# EAGLE board ambilight (EAGLE 6.4)
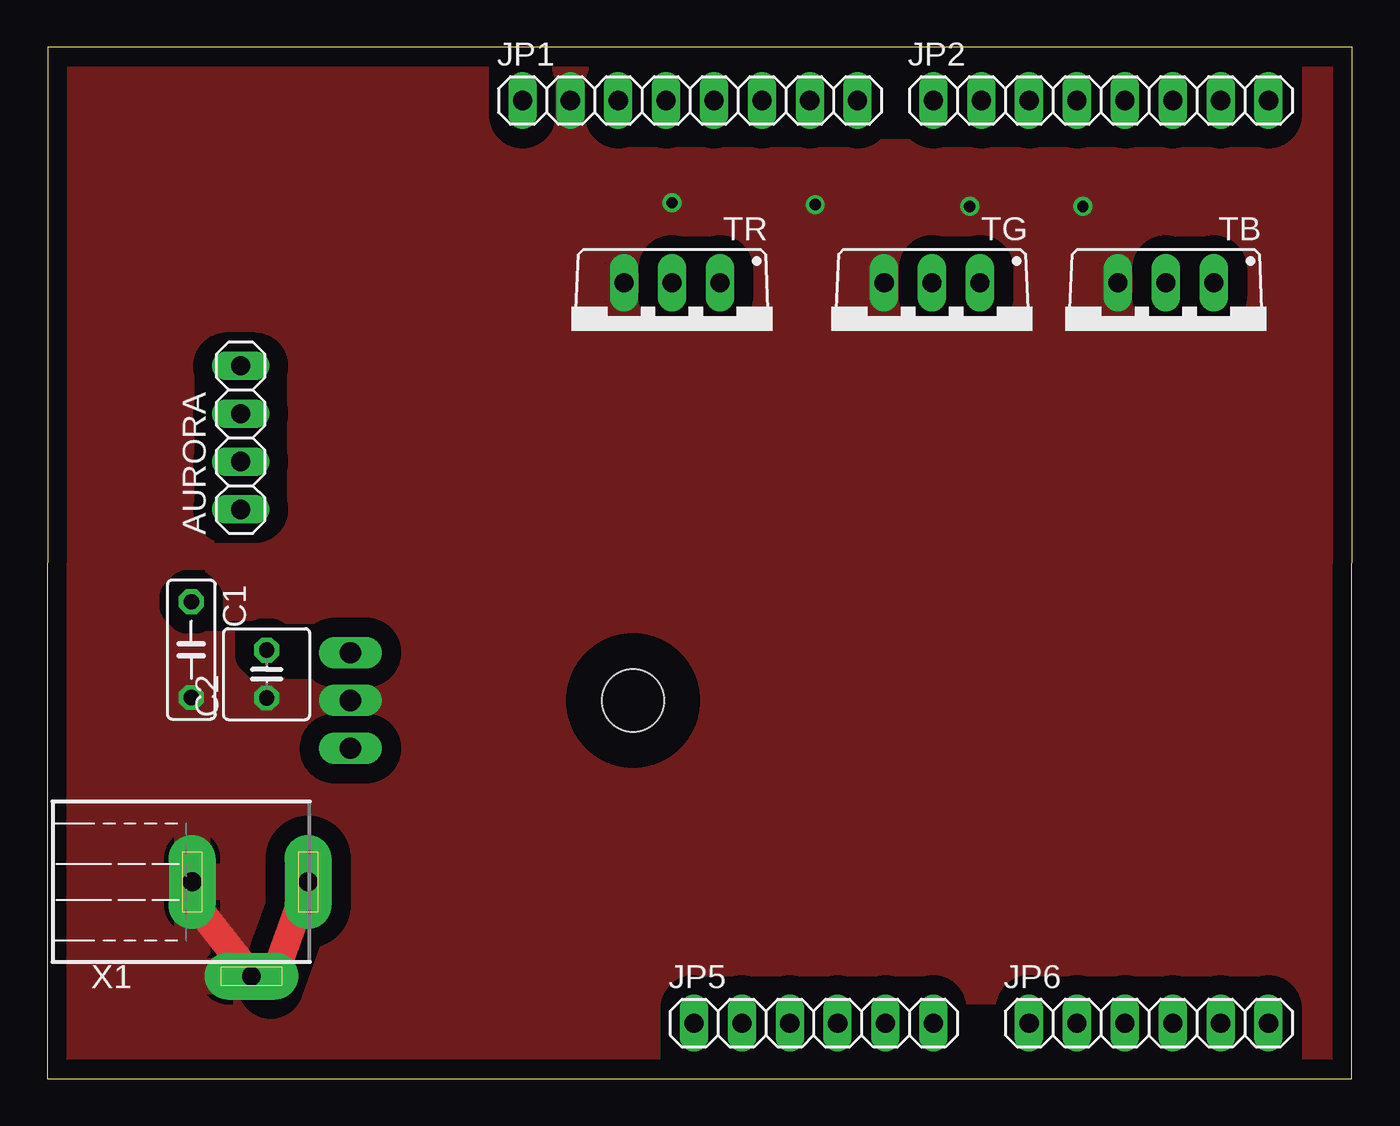
[diagram p0: board, top side]
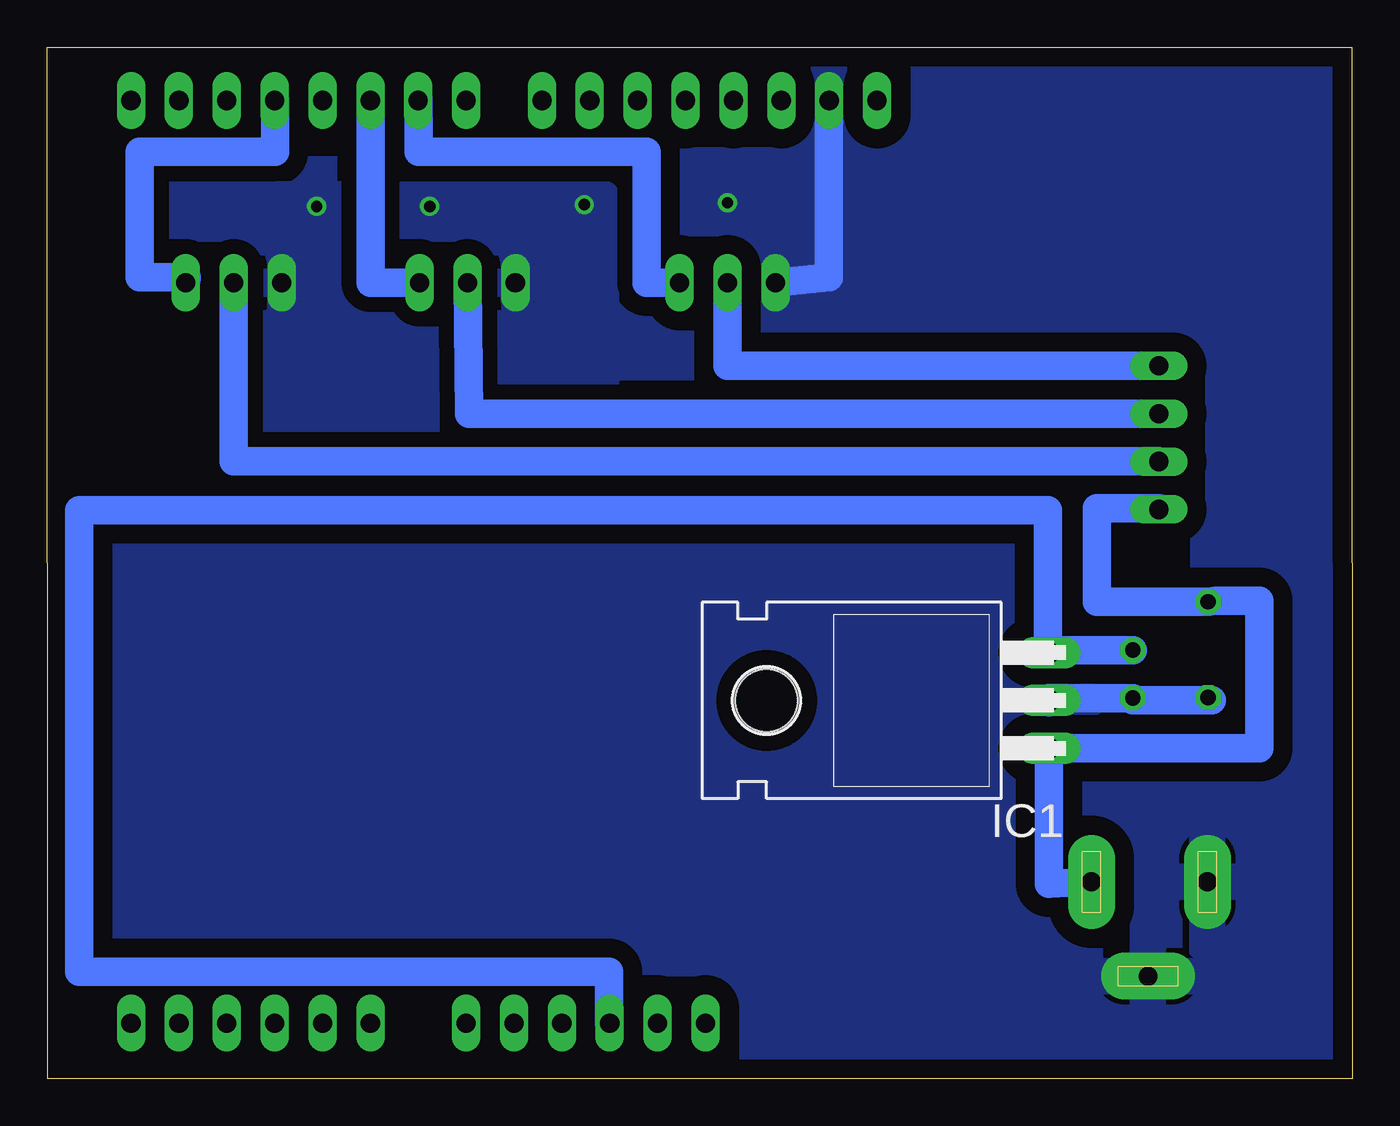
[diagram p1: board, bottom side, seen from below]

Size 69.25 x 54.7 mm. Coordinates in mm from the lower left corner, seen from the top.
Outline: 0,0 69.22,0 69.25,54.7 0.03,54.7 0,0
Copper layers (1*16): Top 0.035mm / dielectric 1.5mm / Bottom 0.035mm
Design rules "default": minimum track width 10mil, minimum drill 24mil, track to track 8mil, track to pad 8mil, pad to pad 8mil, via to via 8mil, smd to smd 8mil, copper to edge 40mil, drill to drill 8mil, minimum pad ring 10mil, minimum via ring 8mil, stop-mask expansion 4mil, vias tented up to drill 0mil, thermal gap 10mil

## Footprints (pad centres in the part's own frame; a part is rotated, then mirrored left to right if it is on the bottom)
1X04 = drill 1.016 long: 1 -3.81,0; 2 -1.27,0; 3 1.27,0; 4 3.81,0
C050-025X075 = drill 0.813 octagon: 1 -2.54,0; 2 2.54,0
C025-050X050 = drill 0.813 octagon: 1 -1.27,0; 2 1.27,0
TO220H = drill 1.118 long: 1 -2.54,-10.16; 2 0,-10.16; 3 2.54,-10.16 | hole 3.302: 0,4.826
1X08 = drill 1.016 long: 1 -8.89,0; 2 -6.35,0; 3 -3.81,0; 4 -1.27,0; 5 1.27,0; 6 3.81,0; 7 6.35,0; 8 8.89,0
1X06 = drill 1.016 long: 1 -6.35,0; 2 -3.81,0; 3 -1.27,0; 4 1.27,0; 5 3.81,0; 6 6.35,0
TO220BV = drill 1.016 long: D 0,-2.54; G -2.54,-2.54; S 2.54,-2.54
733980-62 = drill 1 pad 2.5 long: 1 0,8.57; 2 0,2.42; 3 5,5.57

## Placement (x,y rotation side)
AURORA  [1X04]  10.27,33.99 90 top
C1  330n  [C050-025X075]  7.65,22.75 270 top
C2  100n  [C025-050X050]  11.65,21.45 90 top
IC1  7805T  [TO220H]  26.25,20.05 90 bottom
JP1  [1X08]  34.11,51.87 0 top
JP2  [1X08]  55.91,51.87 0 top
JP5  [1X06]  40.67,2.94 0 top
JP6  [1X06]  58.45,2.94 0 top
TB  foo  [TO220BV]  59.35,39.66 180 top
TG  foo  [TO220BV]  46.95,39.66 180 top
TR  foo  [TO220BV]  33.15,39.66 180 top
X1  [733980-62]  5.27,10.43 270 top

## Library data of the parts
AURORA JP1 JP2 JP5 JP6 = pinhead
C1 = resistor
C2 = rcl
IC1 = linear
TB TG TR = transistor-power
X1 = con-conrad

## Nets
GND: C1.2 C2.1 IC1.2 JP1.2 TB.S TG.S TR.S X1.2 X1.3
N$4: C2.2 IC1.3 JP5.3
N$6: AURORA.1 C1.1 IC1.1 X1.1
N$7: JP2.5 TB.G
N$9: JP2.3 TG.G
N$10: JP2.2 TR.G
N$11: AURORA.4 TR.D
N$12: AURORA.3 TG.D
N$13: AURORA.2 TB.D

## Tracks (layer width: path | path; a pad name or v marks a point on that pad's centre or on a via)
GND  (via drill 0.6)
  Top 1.5: X1.3 7.33,9.93
  Bottom 1.5: 16.09,19.95 IC1.2 16.09,20.18 C2.1 | TR.S 27.76,42.5 JP1.2
  other vias: 33.15,46.45 40.75,46.35 48.95,46.25 54.95,46.25
  pour Bottom (isolate 1.016): 0.15,54.75 69.15,54.75 69.15,-0.15 0.15,-0.15
  pour Top (isolate 1.016): 69.15,54.85 69.15,0.05 0.15,0.05 0.15,23.45 0.65,39.05 0.65,39.25 0.05,39.25 0.05,55.55
  pour Bottom (isolate 0.8): 39.65,46.85 67.15,46.85 67.15,31.35 39.65,31.35
N$4
  Bottom 1.5: C2.2 16.09,22.72 IC1.3 | IC1.3 15.95,22.59 | IC1.3 16.15,22.59 16.15,30.15 67.55,30.15 67.55,21.35 67.55,21.05 67.55,5.65 39.45,5.65 39.45,2.94 JP5.3
N$6
  Top 1.5: X1.1 11.85,4.93
  Bottom 1.5: X1.1 16.09,10.33 IC1.1 4.95,17.51 4.95,25.35 7.25,25.35 C1.1 13.55,25.29 13.55,30.25 10.27,30.25 AURORA.1
N$7
  Bottom 1.5: JP2.5 57.15,51.87 57.15,49.15 64.35,49.15 64.35,42.5 61.85,42.5 TB.G
N$9
  Bottom 1.5: TG.G 52.1,42.2 JP2.3
N$10
  Bottom 1.5: JP2.2 49.55,49.15 37.45,49.15 37.45,42.2 TR.G
N$11
  Bottom 1.5: AURORA.4 33.15,37.8 TR.D
N$12
  Bottom 1.5: AURORA.3 46.85,35.26 TG.D
N$13
  Bottom 1.5: AURORA.2 10.27,32.75 59.35,32.75 TB.D
S$3
  Bottom 1.5: 11.65,20.15 11.65,20.05 8.05,20.05 7.45,20.05